# Altium PCB Gateway Board.PcbDoc
Units mm, origin at the board's own origin, x right, y up, seen from the top; angles counter-clockwise.
Board outline 150 x 90 mm, 2 copper layers (Top Layer, Bottom Layer), stack 1.671 mm thick; 43 components, 33 nets, 182 pads, 23 vias.
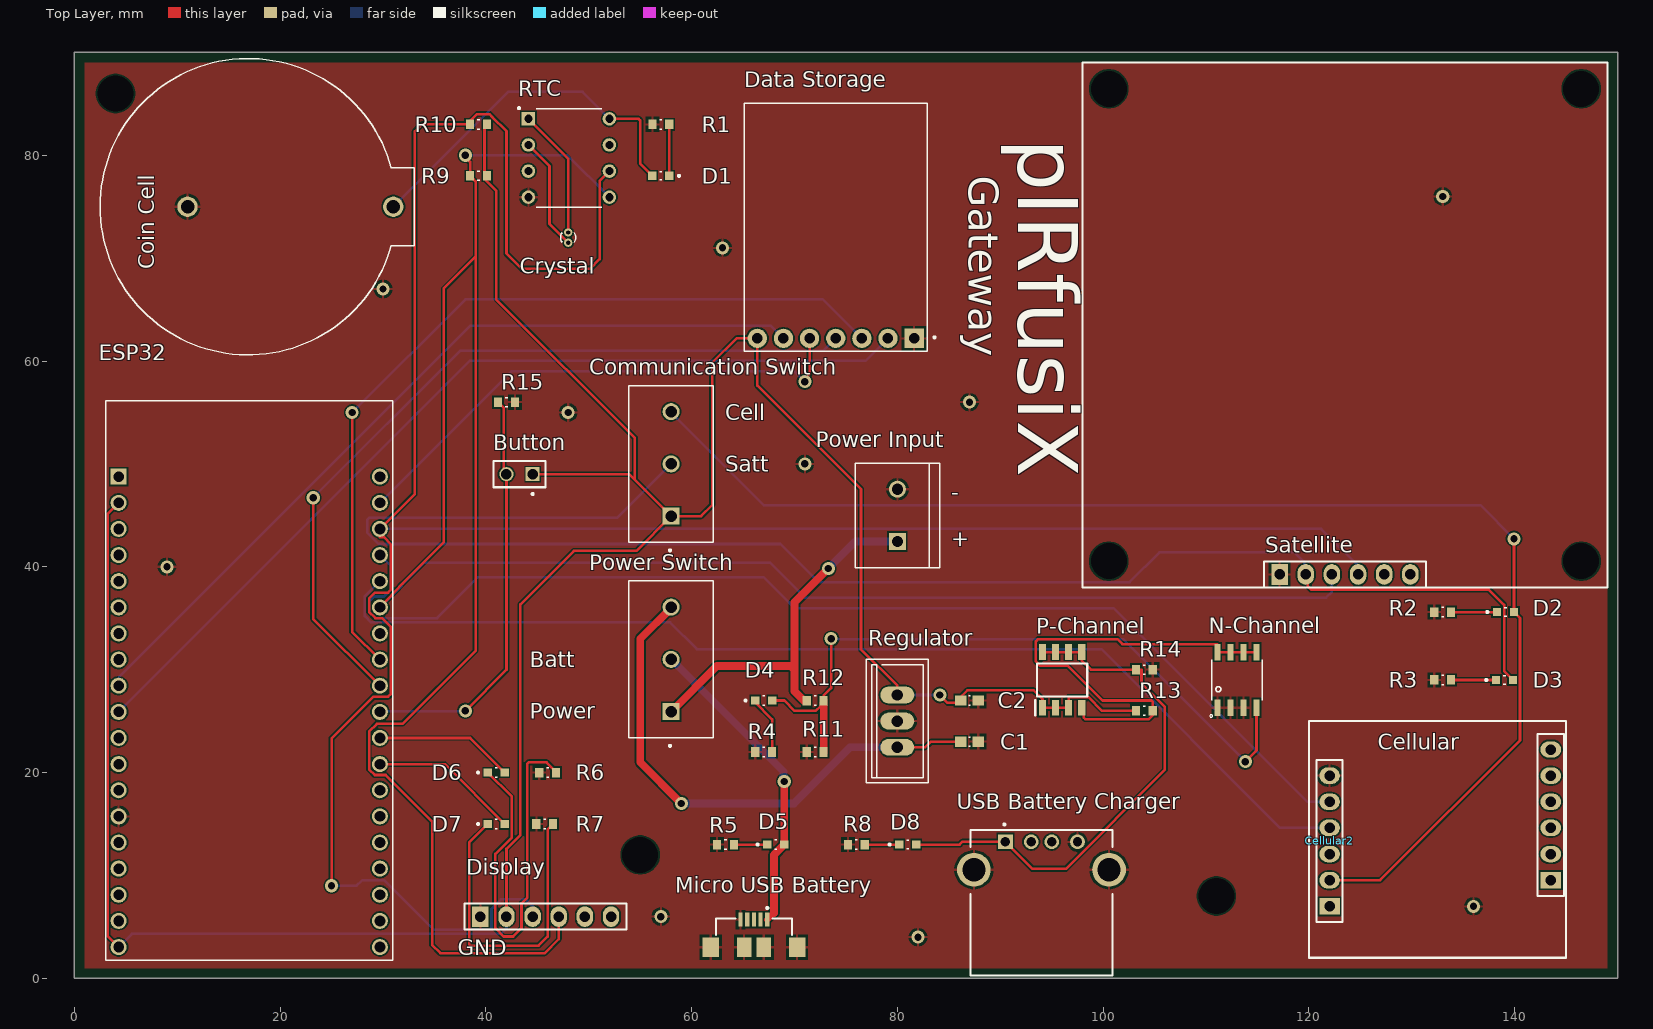
[diagram p0: Top Layer view]
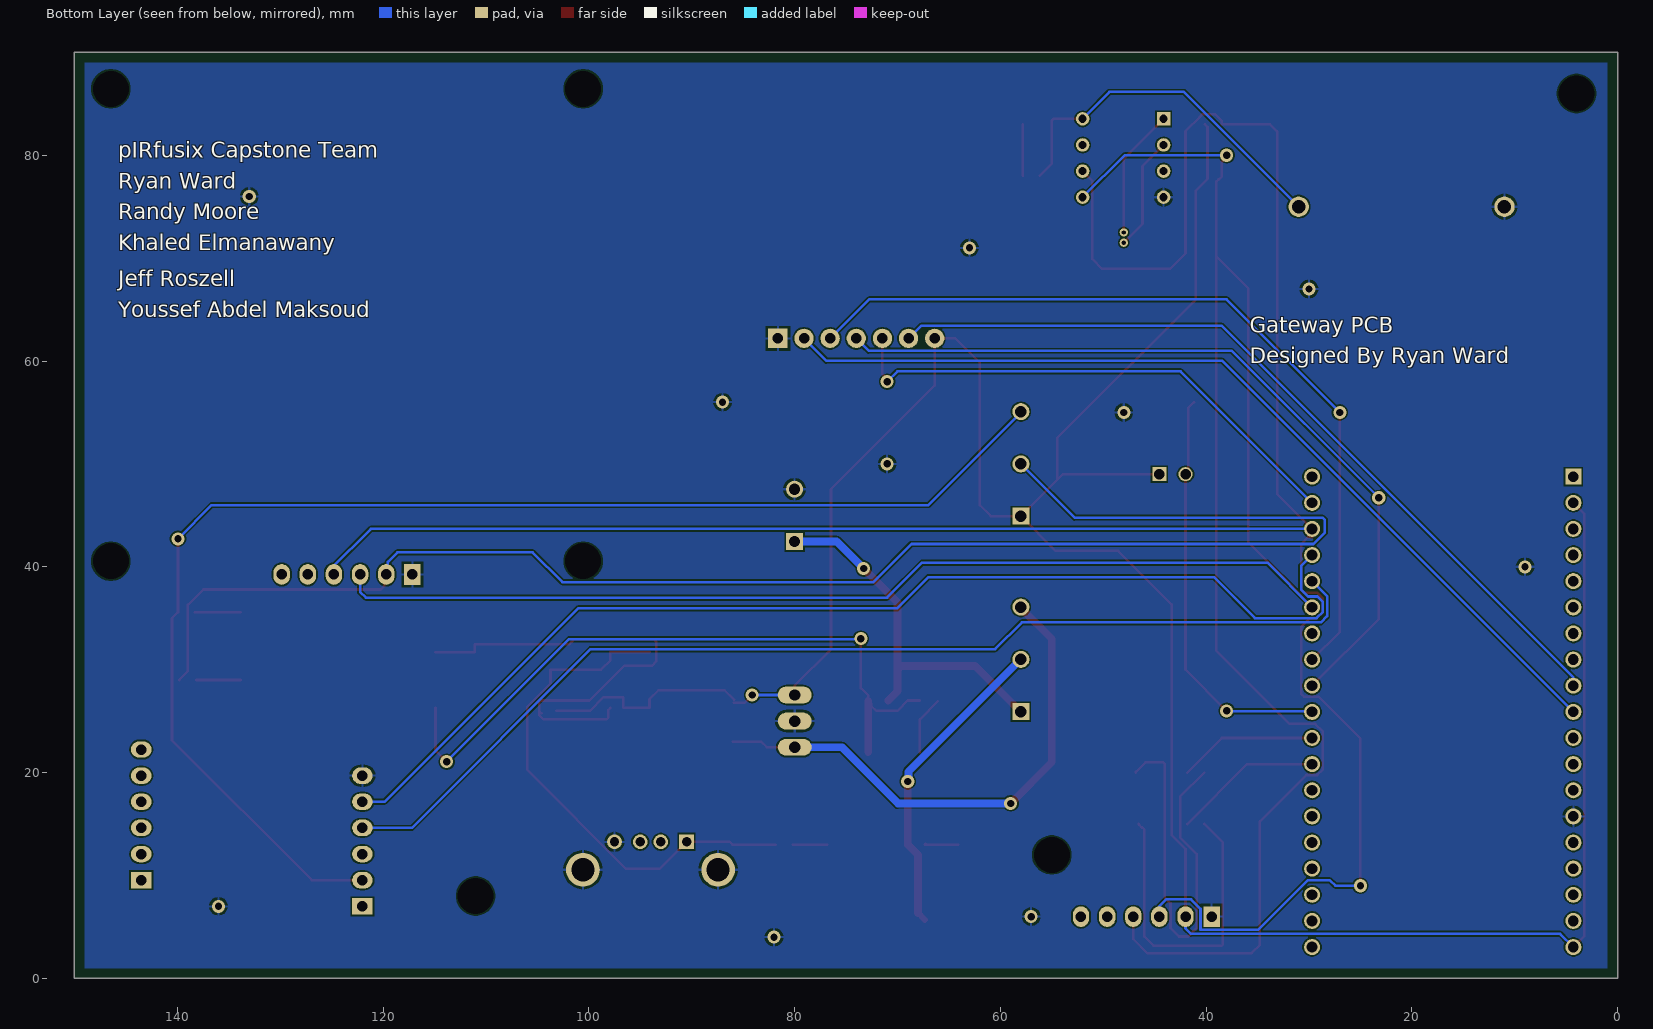
[diagram p1: Bottom Layer view, seen from below]

## Layer stack, top to bottom
Top Solder: solder mask 0.0102, Solder Resist, Dk 3.5
Top Layer: signal copper 0.0356
Dielectric 1: dielectric 1.6, FR-4, Dk 4.8
Bottom Layer: signal copper 0.0356
Bottom Solder: solder mask 0.0102, Solder Resist, Dk 3.5

## Board outline
0,0 0,90 150,90 150,0

## Design rules (kind name [scope] priority, off if disabled: settings)
Clearance [All] p1: gap=0.15 ignorepadtopadclearanceinfootprint=TRUE except(0.254: Arc-Via Track-Via Via-Via)
HoleSize [All] p1: absolutevalues=TRUE maxlimit=6.3 minlimit=0.3 maxpercent=80.000 minpercent=20.000
MinimumSolderMaskSliver [All] p1: minsoldermaskwidth=0.2
PolygonConnect [All] p1: connectstyle=Relief reliefconductorwidth=0.254 reliefentries=4 polygonreliefangle="90 Angle" airgapwidth=0.254
RoutingVias [All] p1: holewidth=0.711 width=1.27 viastyle="Through Hole" minholewidth=0.711 minwidth=1.27 maxholewidth=0.711 maxwidth=1.27
SilkToSolderMaskClearance [IsPad] p1: minsilkscreentomaskgap=0.1 clearancetoexposedcopper=TRUE
SolderMaskExpansion [All] p1: expansion=0.102 istentingtop=FALSE
Width [All] p1: maxlimit=1 minlimit=0.2 preferedwidth=0.254
27 further rules are at their usual default settings.

## Components (designator, comment, footprint, x,y, rotation, side; value= is the part's Value field where it differs from the comment)
Button "TSW-101-23-T-D" SAMTEC_TSW-101-23-T-D 44.54,49 r90 top
C1 "CC0603JRX7R9BB101" CAPC1608X90 87,23 r0 top
C2 "CC0603JRX7R9BB331" CAPC1608X90 87,27 r0 top
Cellular "1x6 Header" Header6x2 143.5,15.89 r180 top
Cellular2 "1x6 Header" Header6x2 122,13.35 r180 top
"Coin Cell" "BH2430T-C" BAT_BH2430T-C 21,75 r90 top
"Communication Switch" "282837-3" TE_282837-3 58,50 r90 top
Crystal "ECS-.327-8-14X" XTAL_ECS-.327-8-14X 48,72 r90 top
D1 "SML-D12D1WT86" LED_SML-D12D1WT86 57,78 r180 top
D2 "SML-D12FWT86" LED_SML-D12FWT86 139.105,35.6 r0 top
D3 "SML-D12FWT86" LED_SML-D12FWT86 139,29 r0 top
D4 "SML-D12U1WT86" LED_SML-D12Y1WT86 67,27 r0 top
D5 "SML-D12U1WT86" LED_SML-D12Y1WT86 68.175,13 r0 top
D6 "SML-D12Y1WT86" LED_SML-D12Y1WT86 41,20 r0 top
D7 "SML-D12Y1WT86" LED_SML-D12Y1WT86 41,15 r0 top
D8 "SML-D12D1WT86" LED_SML-D12D1WT86 81,13 r0 top
"Data Storage" "DEV-13743" MODULE_DEV-13743 74,73 r0 top
Display "1x6 Header" Header6x2 45.81,6 r90 top
ESP32 "ESP32-DEVKITC-32D" MODULE_ESP32-DEVKITC-32D 17,29 r0 top
"Micro USB Battery" "USB3100-XX-X_REVB" GCT_USB3100-XX-X_REVB 66.05,3.025 r0 top
N-Channel "FDS2734" SOIC127P600X175-8N#1 113,29 r90 top
P-Channel "FDS6575" SOIC127P600X175-8N#2 96,29 r90 top
"Power Input" "282837-2" TE_282837-2 80,45 r90 top
"Power Switch" "282837-3" TE_282837-3 58,31 r90 top
R1 "RT0603BRD0743RL" RESC1608X55N 57,83 r0 top
R2 "RT0603FRE07140RL" RESC1608X55N 132.999,35.6 r0 top
R3 "RT0603FRE07140RL" RESC1608X55N 133,29 r0 top
R4 "RT0603DRE07196RL" RESC1608X55N 67,22 r0 top
R5 "RT0603FRE07140RL" RESC1608X55N 63.281,13 r0 top
R6 "RT0603FRE07140RL" RESC1608X55N 46,20 r0 top
R7 "RT0603FRE07140RL" RESC1608X55N 45.719,15 r0 top
R8 "RT0603FRE07140RL" RESC1608X55N 76,13 r0 top
R9 "RT0603FRD0711KL" RESC1608X55N 39.281,78 r0 top
R10 "RT0603FRD0711KL" RESC1608X55N 39.281,83 r0 top
R11 "RT0603FRD0711KL" RESC1608X55N 72,22 r180 top
R12 "RT0603FRD0711KL" RESC1608X55N 72,27 r180 top
R13 "RT0603FRD0711KL" RESC1608X55N 104,26 r180 top
R14 "RT0603FRD0711KL" RESC1608X55N 104,30 r180 top
R15 "RT0603FRD0711KL" RESC1608X55N 42,56 r180 top
Regulator "L78S05CV" TO-220-STANDING 79.985,25 r90 top
RTC "MCP7940M-I/P" DIP787W46P254L927H533Q8 48.065,79.73 r0 top
Satellite "1x6 Header" Header6x2 123.5,39.254 r90 top
"USB Battery Charger" "USB1130-15-A_REVA" GCT_USB1130-15-A_REVA 94,10.555 r0 top

## Footprints (in the part's own frame and the unit in brackets; to place one, negate y for a bottom-side part, rotate by r counter-clockwise, add the part's x,y. Pads: shape width x height; smd on the part's side, far side on the other; paste and mask are expansions set on the pad)
BAT_BH2430T-C [mm]
  round 1.981 hole 1.321: NEG(0,10) POS(0,-10)
  silkscreen extent -14.4,-12.05 14.4,18.5
CAPC1608X90 [mm]
  rect 1.1x1 smd: 1(-0.85,0) 2(0.85,0)
  silkscreen extent -0.08,-0.45 0.07,0.45
DIP787W46P254L927H533Q8 [mm]
  rect 1.308x1.308 hole 0.8: 1(-3.935,3.81)
  round 1.308 hole 0.8: 2(-3.935,1.27) 3(-3.935,-1.27) 4(-3.935,-3.81) 5(3.935,-3.81) 6(3.935,-1.27) 7(3.935,1.27) 8(3.935,3.81)
  silkscreen extent -4.95,-4.8 3.18,4.95, body extent -3.94,-4.64 3.94,4.64, height 2.48
GCT_USB1130-15-A_REVA [mm]
  rect 1.428x1.428 hole 0.92: 1(-3.5,2.71)
  round 1.428 hole 0.92: 2(-1,2.71) 3(1,2.71) 4(3.5,2.71)
  round 3.276 hole 2.26: S1(-6.57,0) S2(6.57,0)
  silkscreen extent -6.9,-10.28 6.9,4.5
GCT_USB3100-XX-X_REVB [mm]
  rect 0.4x1.35 smd: 1(1.3,2.675) 2(0.65,2.675) 3(0,2.675) 4(-0.65,2.675) 5(-1.3,2.675)
  rect 1.4x1.9 smd: 6(-0.95,0) 7(0.95,0)
  rect 1.6x1.9 smd: 8(-4.2,0) 9(4.2,0)
  silkscreen extent -3.7,1.2 3.7,3.9
Header6x2 [mm]
  rect 2x1.6 hole 1.02: 1(0,6.35)
  oval 2x1.6 hole 1.02: 2(0,3.81) 3(0,1.27) 4(0,-1.27) 5(0,-3.81) 6(0,-6.35)
  silkscreen extent -1.27,-7.87 1.27,7.87
LED_SML-D12D1WT86 [mm]
  rect 0.8x0.8 smd: A(0.825,0) C(-0.825,0)
  silkscreen extent -1.87,-0.4 0.11,0.4, body extent -0.8,-0.4 0.8,0.4, height 0.55
LED_SML-D12FWT86 [mm]
  rect 0.8x0.8 smd: A(0.825,0) C(-0.825,0)
  silkscreen extent -1.86,-0.4 0.1,0.4, body extent -0.8,-0.4 0.8,0.4, height 0.55
LED_SML-D12Y1WT86 [mm]
  rect 0.8x0.8 smd: A(0.825,0) C(-0.825,0)
  silkscreen extent -1.86,-0.45 0.11,0.45
MODULE_DEV-13743 [mil]
  rect 74x74 hole 40: 1(300,-425)
  round 74 hole 40: 2(200,-425) 3(100,-425) 4(0,-425) 5(-100,-425) 6(-200,-425) 7(-300,-425)
  silkscreen extent -350,-475 382,475
MODULE_ESP32-DEVKITC-32D [mm]
  rect 1.56x1.56 hole 1.04: 1(-12.7,19.76)
  round 1.56 hole 1.04: 2(-12.7,17.22) 3(-12.7,14.68) 4(-12.7,12.14) 5(-12.7,9.6) 6(-12.7,7.06) 7(-12.7,4.52) 8(-12.7,1.98) 9(-12.7,-0.56) 10(-12.7,-3.1) 11(-12.7,-5.64) 12(-12.7,-8.18) 13(-12.7,-10.72) 14(-12.7,-13.26) 15(-12.7,-15.8) 16(-12.7,-18.34) 17(-12.7,-20.88) 18(-12.7,-23.42) 19(-12.7,-25.96) 20(12.7,19.76) 21(12.7,17.22) 22(12.7,14.68) 23(12.7,12.14) 24(12.7,9.6) 25(12.7,7.06) 26(12.7,4.52) 27(12.7,1.98) 28(12.7,-0.56) 29(12.7,-3.1) 30(12.7,-5.64) 31(12.7,-8.18) 32(12.7,-10.72) 33(12.7,-13.26) 34(12.7,-15.8) 35(12.7,-18.34) 36(12.7,-20.88) 37(12.7,-23.42) 38(12.7,-25.96)
  silkscreen extent -13.95,-27.25 13.95,27.15, body extent -13.97,-24.8 13.97,30.3, height 3.25
RESC1608X55N [mm]
  rect 0.79x0.93 smd: 1(-0.82,0) 2(0.82,0)
  silkscreen extent -0.11,-0.45 0.11,0.45
SAMTEC_TSW-101-23-T-D [mm]
  rect 1.37x1.37 hole 1.02: 01(0,0)
  round 1.37 hole 1.02: 02(0,2.54)
  silkscreen extent -2.02,-1.27 1.27,3.81
SOIC127P600X175-8N#1 [mm]
  rect 1.6x0.6 smd: 1(-2.7,1.905) 2(-2.7,0.635) 3(-2.7,-0.635) 4(-2.7,-1.905) 5(2.7,-1.905) 6(2.7,-0.635) 7(2.7,0.635) 8(2.7,1.905)
  silkscreen extent -3.63,-2.45 1.95,2.63, body extent -2.45,-3 2.45,3, height 1.75
SOIC127P600X175-8N#2 [mm]
  rect 1.525x0.7 smd: 1(-2.712,1.905) 2(-2.712,0.635) 3(-2.712,-0.635) 4(-2.712,-1.905) 5(2.712,-1.905) 6(2.712,-0.635) 7(2.712,0.635) 8(2.712,1.905)
  silkscreen extent -3.47,-2.45 1.6,2.61
TE_282837-2 [mm]
  rect 1.65x1.65 hole 1.1: 1(-2.54,0)
  round 1.65 hole 1.1: 2(2.54,0)
  silkscreen extent -5.08,-4.1 5.08,4.1, body extent -5.68,0 5.08,8.2, height 7.25
TE_282837-3 [mm]
  rect 1.65x1.65 hole 1.1: 1(-5.08,0)
  round 1.65 hole 1.1: 2(0,0) 3(5.08,0)
  silkscreen extent -8.5,-4.1 7.62,4.1, body extent -8.22,0 7.62,8.2, height 7.25
TO-220-STANDING [mm]
  oval 1.65x3.3 hole 1.1: 1(-2.54,0) 2(0,0) 3(2.54,0)
  silkscreen extent -6,-3 6,3
XTAL_ECS-.327-8-14X [mm]
  round 0.8 hole 0.4: 1(-0.5,0) 2(0.5,0)
  silkscreen extent -0.47,-0.75 0.47,0.75

## Part data
Button: "TSW Series .100 Terminal Strip", Package=None, Availability=Bad, MF=Samtec, MP=TSW-101-23-T-D, Price=None, SnapEDA_Link=https://www.snapeda.com/parts/TSW-101-23-T-D/Samtec/view-part/3473100/?ref=snap
C1: "CAP CER 100PF 50V X7R 0603", Package=None, Availability=Unavailable, MP=CC0603JRX7R9BB101, Price=None
C2: "Cap Ceramic 330pF 50VDC X7R 5% SMD 0603 125Â°C Paper T/R", Package=None, Availability=Unavailable, MP=CC0603JRX7R9BB331, Price=None
Cellular Cellular2 Display Satellite: library part PPTC061LFBN-RC, "Female, 6 C, Straight, .100\"CC; 3.20mm Tail, No Mt. 100u\" Tin; PBT, Phos Bronze, 105 C", Color=Black, Manufacturer=Sullins, Package Quantity=1000, Supplier Part Number 1=S7004-ND, Category=Connectors, ComponentLink1Description=https://media.digikey.com/pdf/Data%20Sheets/Sullins%20PDFs/Female_Headers.100_DS.pdf?src-supplier=Digi-Key, ComponentLink1URL=https://media.digikey.com/pdf/Data%20Sheets/Sullins%20PDFs/Female_Headers.100_DS.pdf?src-supplier=Digi-Key, ComponentLink2Description=http://www.sullinscorp.com/catalogs/78_Page80-81_HEADER_.100_2.54mm_FEMALE.pdf?src-supplier=Future+Electronics, ComponentLink2URL=http://www.sullinscorp.com/catalogs/78_Page80-81_HEADER_.100_2.54mm_FEMALE.pdf?src-supplier=Future+Electronics, Connector Type=Header, Contact Material=Bronze, Contact Plating=Tin, Contact Type="Female Socket", Height=8.5mm, Housing Material=Plastic, Lead Free="Lead Free", Length=15.7mm, Manufacturer Part Number=PPTC061LFBN-RC, Mount="Through Hole", Number of Positions=6, Number of Rows=1, Packaging=Bulk, Pitch=0.1inch, Pricing 1="1=0.52000, 10=0.44900, 80=0.37050, 440=0.32220, 1000=0.26582, 5000=0.23360, 10000=0.23270 (USD)", RoHS=Yes, RoHS Compliant=Yes, Stock 1=78228, Supplier 1=Digi-Key, Termination=Solder, Width=2.5mm
"Coin Cell": "BATTERY HOLDER COIN PC PIN 24.5mm", Package=None, Availability=Unavailable, MF=MPD, MP=BH2430T-C, Price=None, SnapEDA_Link=https://www.snapeda.com/parts/BH2430T-C/MPD/view-part/4389108/?ref=snap
"Communication Switch" "Power Switch": "Wire to Board 3 Position 5.08 mm Pitch 30-16 AWG Euro Style Terminal Block", Package=None, Availability=Good, Check_prices=https://www.snapeda.com/parts/282837-3/TE%20Connectivity%20AMP%20Connectors/view-part/2765182/?ref=eda, MF="TE Connectivity", MP=282837-3, Price=None, Purchase-URL=https://pricing.snapeda.com/search/part/282837-3/?ref=eda, SnapEDA_Link=https://www.snapeda.com/parts/282837-3/TE%20Connectivity%20AMP%20Connectors/view-part/2765182/?ref=snap
Crystal: "32.768kHz Â±20ppm Crystal 8pF 40 kOhms Cylindrical Can, Radial", Package="Cylindrical Can Radial  ECS International", Arrow_Electronics-Purchase-URL=https://snapeda.com/shop?store=Arrow+Electronics&id=2180365, Availability=Good, DigiKey-Purchase-URL=https://snapeda.com/shop?store=DigiKey&id=2180365, MF="ECS Inc.", Mouser-Purchase-URL=https://snapeda.com/shop?store=Mouser&id=2180365, MP=ECS-.327-8-14X, Price=None, SnapEDA_Link=https://www.snapeda.com/parts/ECS-.327-8-14X/ECS%20Inc./view-part/2180365/?ref=snap
D1 D8: "Orange 605nm LED Indication - Discrete 2.2V 0603 (1608 Metric)", Package="0603 Rohm", Availability=Good, Check_prices=https://www.snapeda.com/parts/SML-D12D1WT86/Rohm/view-part/681299/?ref=eda, MF=Rohm, MP=SML-D12D1WT86, Price=None, Purchase-URL=https://pricing.snapeda.com/search/part/SML-D12D1WT86/?ref=eda, SnapEDA_Link=https://www.snapeda.com/parts/SML-D12D1WT86/Rohm/view-part/681299/?ref=snap
D2 D3: "Green 565nm LED Indication - Discrete 2.2V 0603 (1608 Metric)", Package="0603 Rohm", Availability=Good, Check_prices=https://www.snapeda.com/parts/SML-D12FWT86/Rohm/view-part/2753923/?ref=eda, MF=Rohm, MP=SML-D12FWT86, Price=None, Purchase-URL=https://pricing.snapeda.com/search/part/SML-D12FWT86/?ref=eda, SnapEDA_Link=https://www.snapeda.com/parts/SML-D12FWT86/Rohm/view-part/2753923/?ref=snap
D4 D5: "Red 620nm LED Indication - Discrete 2.2V 0603 _1608 Metric_", Package="0603 Rohm", Availability=Unavailable, MF=Rohm, MP=SML-D12U1WT86, Price=None, SnapEDA_Link=https://www.snapeda.com/parts/SML-D12U1WT86/Rohm/view-part/481503/?ref=snap
D6 D7: "Yellow 590nm LED Indication - Discrete 2.2V 0603 _1608 Metric_", Package="0603 Rohm", Availability=Unavailable, MF=Rohm, MP=SML-D12Y1WT86, Price=None, SnapEDA_Link=https://www.snapeda.com/parts/SML-D12Y1WT86/Rohm/view-part/617733/?ref=snap
"Data Storage": "SPARKFUN LEVEL SHIFTING MICROSD", Package=None, Availability=Unavailable, Check_prices=https://www.snapeda.com/parts/DEV-13743/SparkFun%20Electronics/view-part/567676/?ref=eda, MF="SparkFun Electronics", MP=DEV-13743, Price=None, SnapEDA_Link=https://www.snapeda.com/parts/DEV-13743/SparkFun%20Electronics/view-part/567676/?ref=snap
ESP32: "EVAL BOARD FOR ESP-WROOM-32", Package=None, Availability=Warning, Check_prices=https://www.snapeda.com/parts/ESP32-DEVKITC-32D/Espressif%20Systems/view-part/2777395/?ref=eda, MF="Espressif Systems", MP=ESP32-DEVKITC-32D, Price=None, Purchase-URL=https://pricing.snapeda.com/search/part/ESP32-DEVKITC-32D/?ref=eda, SnapEDA_Link=https://www.snapeda.com/parts/ESP32-DEVKITC-32D/Espressif%20Systems/view-part/2777395/?ref=snap
"Micro USB Battery": "USB - micro B USB 2.0 Receptacle Connector 5 Position Surface Mount, Right Angle", Package=None, Availability=Unavailable, MF="Global Connector Technology", MP=USB3100-30-A, Price=None, SnapEDA_Link=https://www.snapeda.com/parts/USB3100-30-A/Global%20Connector%20Technology/view-part/49207/?ref=snap
N-Channel: "N-Channel 250V 3A (Ta) 2.5W (Ta) Surface Mount 8-SOIC", Package="SO-8 ON Semiconductor", Availability=Warning, Check_prices=https://www.snapeda.com/parts/FDS2734/ON%20Semiconductor/view-part/1822193/?ref=eda, MF="ON Semiconductor", MP=FDS2734, Price=None, Purchase-URL=https://pricing.snapeda.com/search/part/FDS2734/?ref=eda, SnapEDA_Link=https://www.snapeda.com/parts/FDS2734/ON%20Semiconductor/view-part/1822193/?ref=snap
P-Channel: "P-Channel 20V 10A (Ta) 2.5W (Ta) Surface Mount 8-SOIC", Package="SO-8 ON Semiconductor", Availability=Warning, Check_prices=https://www.snapeda.com/parts/FDS6575/ON%20Semiconductor/view-part/2754514/?ref=eda, MF="ON Semiconductor", MP=FDS6575, Price=None, Purchase-URL=https://pricing.snapeda.com/search/part/FDS6575/?ref=eda, SnapEDA_Link=https://www.snapeda.com/parts/FDS6575/ON%20Semiconductor/view-part/2754514/?ref=snap
"Power Input": "Connector Terminal Blocks Receptacle 2 Position 5.08mm Solder Straight Thru-Hole 13.5A/Contact", Package=None, Availability=Good, Check_prices=https://www.snapeda.com/parts/282837-2/TE%20Connectivity%20AMP%20Connectors/view-part/2549980/?ref=eda, MF="TE Connectivity", MP=282837-2, Price=None, Purchase-URL=https://pricing.snapeda.com/search/part/282837-2/?ref=eda, SnapEDA_Link=https://www.snapeda.com/parts/282837-2/TE%20Connectivity%20AMP%20Connectors/view-part/2549980/?ref=snap
R1: "Res Thin Film 0603 43 Ohm 0.1% 1/10W Â±25ppm/Â°C Molded SMD SMD Paper T/R", Package=None, Availability=Unavailable, MP=RT0603BRD0743RL, Price=None
R2 R3 R5 R6 R7 R8: "RES SMD 140 OHM 1% 1/10W 0603", Package=None, Availability=Unavailable, MP=RT0603FRE07140RL, Price=None
R4: "RES SMD 196 OHM 0.5% 1/10W 0603", Package=None, Availability=Unavailable, MP=RT0603DRE07196RL, Price=None
R9 R10 R11 R12 R13 R14 R15: "RES SMD 11K OHM 1% 1/10W 0603", Package=None, Availability=Unavailable, MP=RT0603FRD0711KL, Price=None
Regulator: "Linear Voltage Regulator IC 1 Output 2A TO-220AB", Package="TO-220 STMicroelectronics", Availability=Unavailable, MF=STMicroelectronics, MP=L78S05CV, Price=None, SnapEDA_Link=https://www.snapeda.com/parts/L78S05CV/STMicroelectronics/view-part/8089/?ref=snap
RTC: "Real Time Clock (RTC) IC Clock/Calendar 64B IÂ²C, 2-Wire Serial 8-DIP (0.300, 7.62mm)", Package="DIP-8 Microchip", Availability="In Stock", Check_prices=https://www.snapeda.com/parts/MCP7940M-I/P/Microchip/view-part/?ref=eda, MF=Microchip, MP=MCP7940M-I/P, Price=None, Purchase-URL=https://pricing.snapeda.com/search/part/MCP7940M-I/P/?ref=eda, SnapEDA_Link=https://www.snapeda.com/parts/MCP7940M-I/P/Microchip/view-part/?ref=snap
"USB Battery Charger": Package=None, Availability=Unavailable, Check_prices=https://www.snapeda.com/parts/USB1130-15-A/Global%20Connector%20Technology/view-part/5160678/?ref=eda, MF="Global Connector Technology", MP=USB1130-15-A, Price=None, SnapEDA_Link=https://www.snapeda.com/parts/USB1130-15-A/Global%20Connector%20Technology/view-part/5160678/?ref=snap

## Free pads (board coordinates)
  round 1.524 hole 3.5 unplated: 6(4,86) 6(55,12) 6(100.54,40.54) 6(100.54,86.46) 6(111,8) 6(146.46,40.54) (146.46,86.46)

## Via types
v1: diameter 1.27, hole 0.711, Top Layer to Bottom Layer, 23 vias

## Nets (pads, with @x,y where several pads share a name; then routed paths per layer and width w, separated by ;. In a path a pad name is that pad's centre, name@x,y a point inside that pad or via, vN(x,y) a via of type N, cw(c..) or ccw(c..) an arc to the next point about the centre after c; other vN are vias at no path point)
5V: "Communication Switch.1" "Data Storage.7" Button.01 C2.1 Display.2 ESP32.2 ESP32.19 P-Channel.1 P-Channel.2 P-Channel.3 R9.2 R10.2 R13.2 Regulator.3 | length 279.3
  Top Layer w0.254: ESP32.19 3.226,4.114 3.226,45.146 ESP32.2 ; R10.2 39.866,82.765 39.866,77.696 41,76.562 41,66 54.475,52.525 54.475,48.445 ; Display.2 42,12.587 43.342,13.929 43.342,36.342 48.553,41.553 54.633,41.553 58,44.92 ; Button.01 53.92,49 54.475,48.445 ; Regulator.3 79.985,28.448 76.454,31.979 76.454,47.549 66.38,57.623 66.38,62.205 64.365,62.205 62,59.84 62,46 60.92,44.92 58,44.92 ; v1(84.123,27.54) 84.887,26.776 C2.1@85.884,26.776 ; C2.1@85.884,27.083 86.801,28 93.234,28 94.095,27.139 P-Channel.1 P-Channel.2 P-Channel.3 96.635,27.33 98.552,27.33 99.882,26 R13.2 ; 54.475,48.445 58,44.92
  Bottom Layer w0.254: ESP32.19 5.578,4.318 41.453,4.318 42,4.865 Display.2 ; Regulator.3 v1(84.123,27.54)
"Battery LED": "Micro USB Battery.1" "Power Switch.2" D5.A | length 30.5
  Top Layer w0.6: 67.35,5.7 68,6.35
  Top Layer w0.762: 68,6.35 68,12 D5.A v1(69,19.138)
  Bottom Layer w0.762: 58,31 68.936,20.064 68.936,19.202 v1(69,19.138)
CD: "Data Storage.2" ESP32.10 | length 89.8
  Bottom Layer w0.254: ESP32.10 38.416,60.016 76.891,60.016 79.08,62.205
"Cellular LED": "Communication Switch.3" Cellular2.2 D2.A | length 131
  Top Layer w0.254: Cellular2.2 126.924,9.54 140.513,23.129 140.513,35.017 D2.A v1(139.93,42.721)
  Bottom Layer w0.254: 57.96,55.04 67,46 136.651,46 v1(139.93,42.721)
"Charging LED": "USB Battery Charger.1" D8.A P-Channel.5 P-Channel.6 P-Channel.7 P-Channel.8 R14.2 | length 50.8
  Top Layer w0.254: D8.A 86.03,13 86.295,13.265 90.5,13.265 93.122,10.643 96.368,10.643 106,20.275 106,26.391 103.719,28.672 103.719,30 R14.2 98.791,30 97.905,30.886 P-Channel.5 P-Channel.6 P-Channel.7 P-Channel.8
CS: "Data Storage.6" ESP32.9 | length 80.1
  Bottom Layer w0.254: ESP32.9 4.3,29.263 38.461,63.424 67.701,63.424 68.92,62.205
"Debug Button": Button.02 ESP32.29 R15.2 | length 40.3
  Top Layer w0.254: v1(38,26) 42,30 Button.02 42,49.302 41.719,49.583 41.719,55.461 R15.2
  Bottom Layer w0.254: ESP32.29 29.75,25.95 37.95,25.95 v1(38,26)
"Debug LED1": D6.A ESP32.30 | length 13.5
  Top Layer w0.254: ESP32.30 38.465,23.36 D6.A
"Debug LED2": D7.A ESP32.31 | length 14.5
  Top Layer w0.254: ESP32.31 36.005,20.82 D7.A
GND: "Coin Cell.NEG" "Data Storage.1" "Micro USB Battery.5" "Micro USB Battery.6" "Micro USB Battery.7" "Micro USB Battery.8" "Micro USB Battery.9" "Power Input.2" "USB Battery Charger.4" "USB Battery Charger.S1" "USB Battery Charger.S2" C1.2 C2.2 Cellular2.6 Display.1 ESP32.14 N-Channel.1 N-Channel.2 N-Channel.3 R1.1 R2.1 R3.1 R4.1 R5.1 R6.1 R7.1 R8.1 R11.2 R14.1 R15.1 Regulator.2 RTC.4 Satellite.1
  other v1: 82,4 57,6 136,7 9,40 71,50 48,55 87,56 30,67 63,71 133,76
MISO: "Data Storage.3" ESP32.27 | length 80.8
  Top Layer w0.254: v1(27,55) 27,33.68 ESP32.27
  Bottom Layer w0.254: v1(27,55) 38,66 72.745,66 76.54,62.205
MOSI: "Data Storage.5" ESP32.21 | length 51.4
  Top Layer w0.254: v1(71,58) 71,58.275 71.46,58.735 71.46,62.205
  Bottom Layer w0.254: ESP32.21 42.48,59 70,59 v1(71,58)
NetC1_1: "Power Switch.3" C1.1 Regulator.1 | length 51.5
  Top Layer w0.254: Regulator.1 82.702,22.46 83.242,23 C1.1@86,23
  Top Layer w0.762: 58,36.08 58,36 55,33 55,21 v1(59,17)
  Bottom Layer w0.762: v1(59,17) 69.934,17 75.394,22.46 Regulator.1
NetCrystal_1: Crystal.1 RTC.2 | length 11.1
  Top Layer w0.254: RTC.2 46.177,78.953 46.177,73.323 Crystal.1
NetCrystal_2: Crystal.2 RTC.1 | length 12.6
  Top Layer w0.254: RTC.1 48,79.67 Crystal.2
NetD1_C: D1.C R1.2 | length 5
  Top Layer w0.254: R1.2 57.82,78.005 D1.C
NetD2_C: D2.C R2.2 | length 4.5
  Top Layer w0.254: R2.2 D2.C
NetD3_C: D3.C R3.2 | length 4.4
  Top Layer w0.254: R3.2 D3.C
NetD4_C: D4.C R4.2 | length 5.6
  Top Layer w0.254: D4.C@66.088,26.912 67.82,25.18 R4.2
NetD5_C: D5.C R5.2 | length 3.4
  Top Layer w0.254: R5.2 D5.C D5.C@67.278,13.072
NetD6_C: D6.C R6.2 | length 39.5
  Top Layer w0.254: D6.C 42.52,17.655 42.52,13.691 40.919,12.09 40.919,4.877 41.732,4.064 42.647,4.064 43.459,4.877 43.459,7.29 44,7.83 44,20.851 44.149,21 45.89,21 46.82,20.07 R6.2
NetD7_C: D7.C R7.2 | length 31.7
  Top Layer w0.254: D7.C 38.379,13.204 38.379,3.302 38.505,3.176 45.112,3.176 46,4.064 46,14.461 46.201,14.662 46.271,14.662 46.539,14.93 R7.2
NetD8_C: D8.C R8.2 | length 3.4
  Top Layer w0.254: R8.2 D8.C
NetN-Channel_5: N-Channel.5 N-Channel.6 N-Channel.7 N-Channel.8 P-Channel.4 R13.1 | length 46.9
  Top Layer w0.254: P-Channel.4 98.106,26.087 98.106,25.346 98.255,25.197 104.435,25.197 104.82,25.582 R13.1 R13.1@104.584,25.764 ; R13.1@104.82,26.142 104.82,26.851 104.671,27 99.949,27 96.571,30.378 93.878,30.378 93.447,30.81 93.447,32.741 93.675,32.969 101.371,32.969 101.854,32.487 111.095,32.487 N-Channel.8 N-Channel.7 N-Channel.6 N-Channel.5
"NetPower Input_1": "Power Input.1" "Power Switch.1" R12.2 | length 36.4
  Top Layer w0.762: 58,25.92 62.433,30.353 69.647,30.353 70,30 ; R12.2@70.899,27 70,27.899 70,30 ; v1(73.279,39.827) 70,36.548 70,30
  Bottom Layer w0.762: v1(73.279,39.827) 75.912,42.46 80,42.46
"Outlet LED": D4.A N-Channel.4 R11.1 R12.1 | length 67.8
  Top Layer w0.254: D4.A 69,27 70,26 72.059,26 72.552,26.493 R12.1@72.552,26.732 ; R12.1@72.833,26.987 R12.1 72.82,27.481 73.558,28.219 v1(73.558,33.016) ; v1(113.817,21.057) 114.905,22.144 N-Channel.4
  Top Layer w0.762: R11.1@72.833,22.013 R12.1@72.833,26.987
  Bottom Layer w0.254: v1(73.558,33.016) 73.605,32.969 101.905,32.969 v1(113.817,21.057)
"RTC LED": "Coin Cell.POS" D1.A RTC.8 | length 35.8
  Top Layer w0.254: RTC.8 54.851,83.54 55,83.391 55,79.175 D1.A
  Bottom Layer w0.254: 30.856,74.856 42.157,86.157 49.383,86.157 RTC.8
RX: Cellular2.4 ESP32.24 | length 106.3
  Bottom Layer w0.254: ESP32.24 28.239,37.139 28.239,35.214 28.854,34.599 57.908,34.599 60.507,32 99.826,32 117.206,14.62 Cellular2.4
"Satellite LED": "Communication Switch.2" D3.A Satellite.2 | length 158.5
  Top Layer w0.254: Satellite.2 119.899,39.045 119.899,38.101 120.205,37.795 137.465,37.795 138.963,36.297 138.963,29.862 D3.A
  Bottom Layer w0.254: 58,50 52.755,44.755 28.651,44.755 28.448,44.552 28.448,43.332 29.566,42.215 68.631,42.215 72.339,38.506 102.565,38.506 105.461,41.402 118.598,41.402 119.537,40.463 119.537,38.615 Satellite.2@119.69,38.462
SCK: "Data Storage.4" ESP32.28 | length 78.2
  Top Layer w0.254: v1(23.216,46.711) 23.216,34.924 ESP32.28
  Bottom Layer w0.254: v1(23.216,46.711) 37.493,60.988 72.783,60.988 74,62.205
SCL: Display.3 ESP32.22 R10.1 RTC.6 Satellite.4 | length 245.8
  Top Layer w0.254: v1(25,9) 25,23.324 29.058,27.381 30.505,27.381 30.759,27.635 30.759,34.138 29.896,35.001 29.261,35.001 28.643,35.619 28.643,36.898 29.235,37.49 30.48,37.49 30.759,37.77 30.759,42.189 30.074,42.875 29.7,42.875 ESP32.22 33.096,47.076 33.096,82.314 33.782,83 R10.1 38.461,83.312 39.149,84 40.353,84 40.611,83.742 42,82.353 42,70.446 43.485,68.961 50.114,68.961 51.054,69.901 51.054,77.514 RTC.6
  Bottom Layer w0.254: v1(25,9) 27.437,9 27.962,9.525 30.124,9.525 34.926,4.723 40.538,4.723 40.538,6.756 41.453,7.671 43.891,7.671 44.54,7.022 Display.3 ; ESP32.22 35.839,43.68 35.847,43.688 121.183,43.688 125.094,39.778 125.094,39.693 Satellite.4@125.392,39.395
SDA: Display.4 ESP32.25 R9.1 RTC.5 Satellite.3 | length 252.8
  Top Layer w0.254: ESP32.25 31.902,38.379 35.89,42.367 35.89,67.031 39,70.14 ; v1(38,80) 38,79.804 38.461,79.343 R9.1 38.461,77.93 38.729,77.662 38.799,77.662 39,77.461 39,70.14 ; Display.4 47.08,3.798 45.72,2.438 35.585,2.438 34.773,3.251 34.773,15.24 30.251,19.761 29.202,19.761 28.643,20.32 28.643,23.978 29.405,24.74 31.902,24.74 39,31.837 39,70.14
  Bottom Layer w0.254: ESP32.25 34.044,40.404 67.596,40.404 71,37 121.676,37 122.23,37.554 Satellite.3 ; v1(38,80) 47.92,80 RTC.5
TX: Cellular2.5 ESP32.23 | length 111.7
  Bottom Layer w0.254: ESP32.23 30.759,40.081 30.759,37.795 30.081,37.117 29.184,37.117 28.643,36.576 28.643,35.621 29.261,35.003 35.257,35.003 39.254,39 67,39 70.043,35.957 101.043,35.957 119.84,17.16 Cellular2.5
pads on no net: "Micro USB Battery.2" "Micro USB Battery.3" "Micro USB Battery.4" "USB Battery Charger.2" "USB Battery Charger.3" Cellular2.1 Cellular2.3 Cellular.1 Cellular.2 Cellular.3 Cellular.4 Cellular.5 Cellular.6 Display.5 Display.6 ESP32.1 ESP32.3 ESP32.4 ESP32.5 ESP32.6 ESP32.7 ESP32.8 ESP32.11 ESP32.12 ESP32.13 ESP32.15 ESP32.16 ESP32.17 ESP32.18 ESP32.20 ESP32.26 ESP32.32 ESP32.33 ESP32.34 ESP32.35 ESP32.36 ESP32.37 ESP32.38 RTC.3 RTC.7 Satellite.5 Satellite.6

## Polygon pours and split planes (outlines as drawn)
GND on Bottom Layer "GND_L02_P000" (solid, pour order 0): 1,89 149,89 149,1 1,1
GND on Top Layer "GND_L01_P001" (solid, pour order 1): 1,89 149,89 149,1 1,1

## Silkscreen, mask and mechanical layers (free items; w line width, h text height)
Top Overlay:
  lines w0.2: 98,38 149,38 149,89 98,89 98,38 ; 120,2 145,2 145,25 120,25 120,2
  text "pIRfusiX" at 89.778,81.595 h10 r270
  text "Gateway" at 85.939,78 h5 r270
  text "Cell" at 63.254,54.254 h1.52
  text "Satt" at 63.254,49.254 h1.52
  text "-" at 85.254,46.492 h1.52
  text "+" at 85.254,42 h1.52
  text "Batt" at 44.254,30.254 h1.52
  text "Power" at 44.254,25.254 h1.52
  text "GND" at 37.254,2.254 h1.52
Bottom Overlay:
  text "pIRfusix Capstone Team" at 145.746,79.762 h1.52
  text "Ryan Ward" at 145.746,76.762 h1.52
  text "Randy Moore" at 145.746,73.762 h1.52
  text "Khaled Elmanawany" at 145.746,70.762 h1.52
  text "Jeff Roszell" at 145.746,67.254 h1.52
  text "Youssef Abdel Maksoud" at 145.746,64.254 h1.52
  text "Gateway PCB" at 35.746,62.762 h1.52
  text "Designed By Ryan Ward" at 35.746,59.762 h1.52
Board Outline:
  the board outline again, w0.2

## Text inside footprints (layer, text, board x,y; h text height)
"Micro USB Battery": Mechanical 13 "PCB Edge" at 58.415,0.48 h0.67
"USB Battery Charger": Mechanical 13 "PCB EDGE" at 101.45,0.555 h0.81